# Altium PCB PCB1.PcbDoc
Units mm, origin at the board's own origin, x right, y up, seen from the top; angles counter-clockwise.
Board outline 40 x 100 mm, 2 copper layers (Top Layer, Bottom Layer); 27 components, 20 nets, 111 pads, 14 vias.
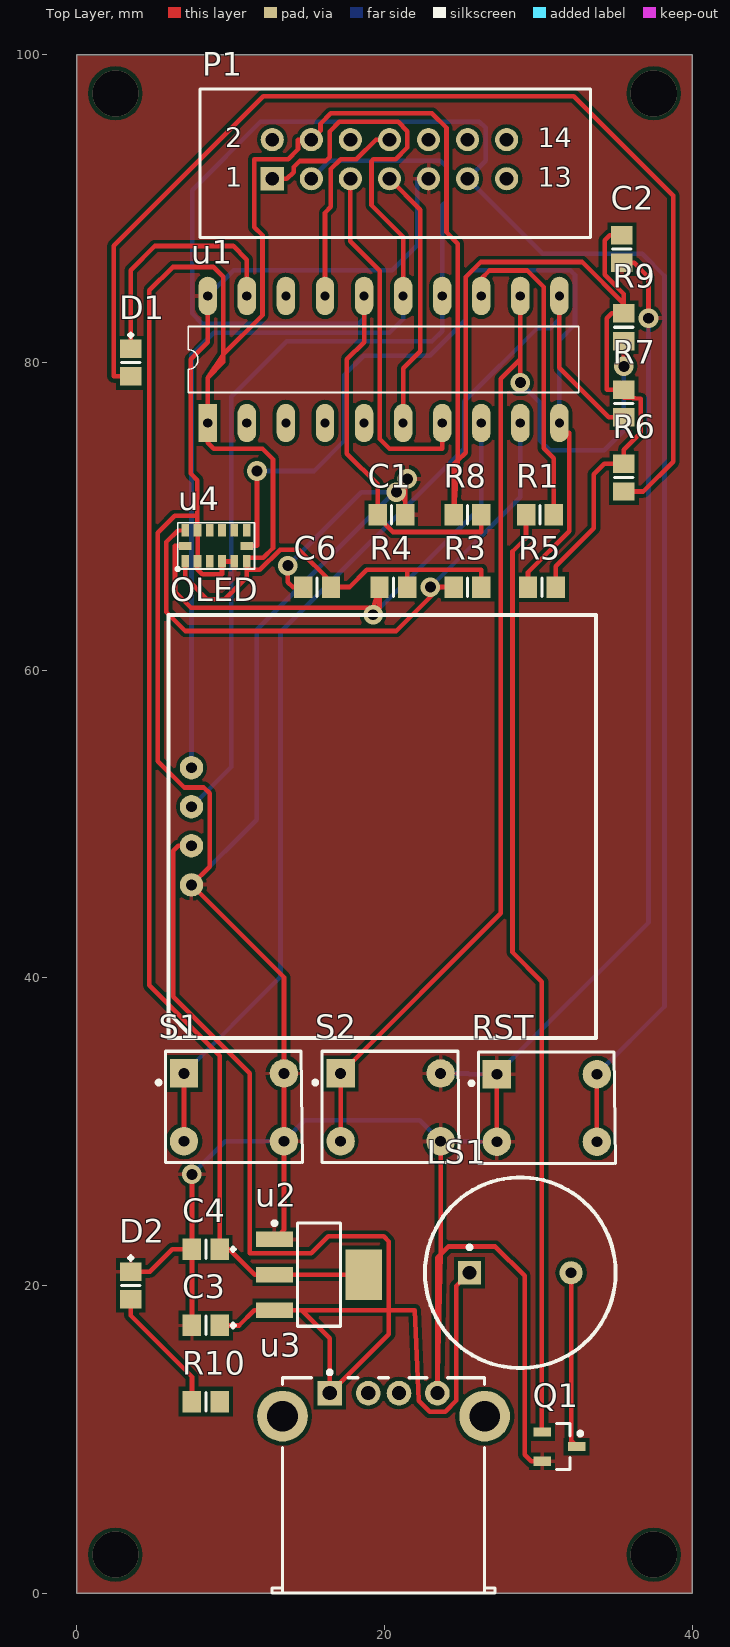
[diagram p0: Top Layer view]
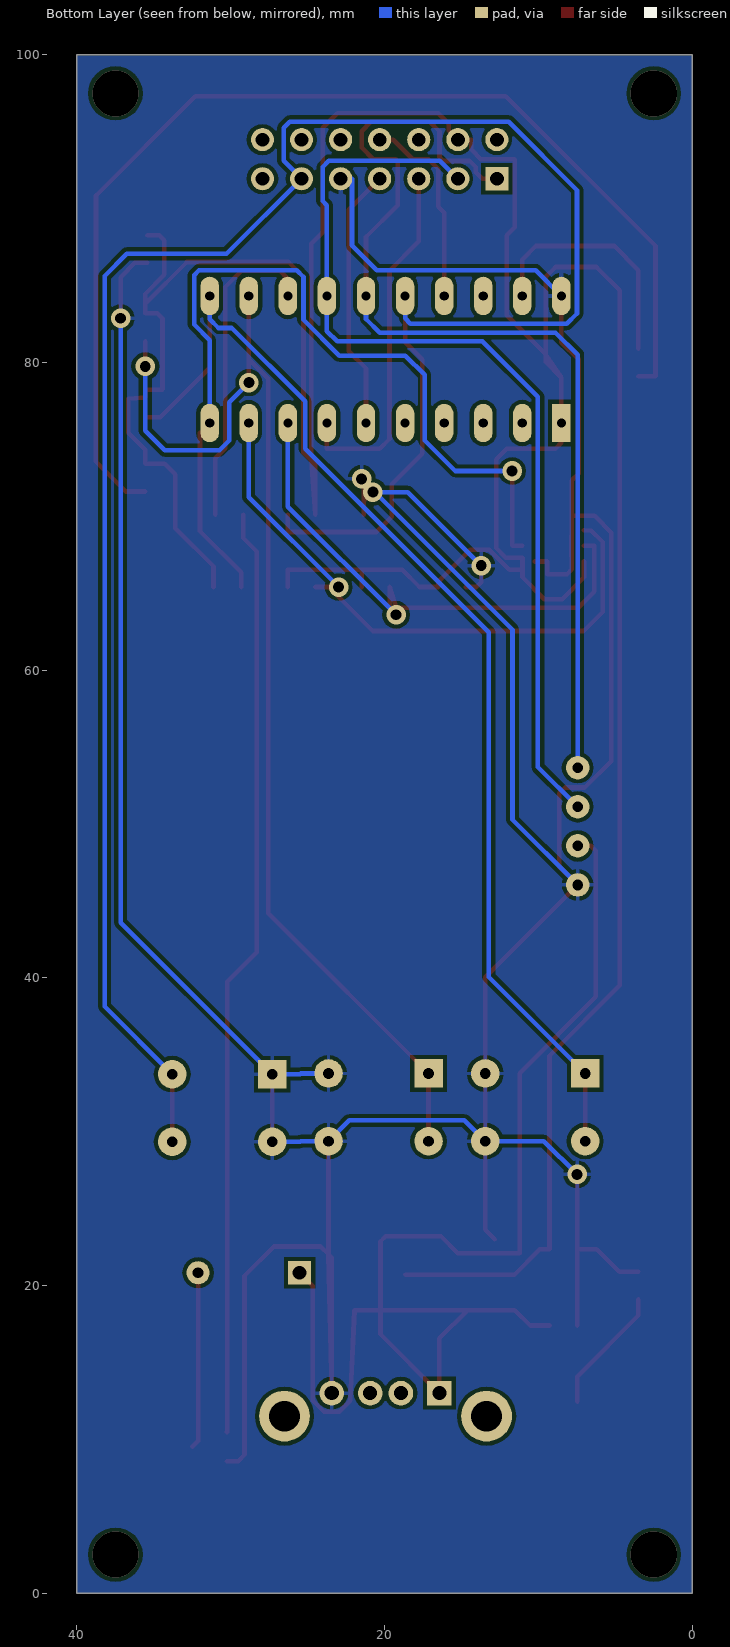
[diagram p1: Bottom Layer view, seen from below]

## Layer stack, top to bottom
Top Solder: solder mask 0.0102, Solder Resist, Dk 3.5
Top Layer: signal copper 0.0356
Dielectric 1: dielectric 0.32, FR-4, Dk 4.8
Bottom Layer: signal copper 0.0356
Bottom Solder: solder mask 0.0102, Solder Resist, Dk 3.5

## Board outline
0,0 0,100 40.005,100 40.005,0

## Design rules (kind name [scope] priority, off if disabled: settings)
Clearance [All] p1: gap=0.254 ignorepadtopadclearanceinfootprint=FALSE except(0: Arc-Hole Track-Hole SMDPad-Hole THPad-Hole Via-Hole Fill-Hole Poly-Hole Region-Hole Text-Hole)
PolygonConnect [All] p1: connectstyle=Relief reliefconductorwidth=0.254 reliefentries=4 polygonreliefangle="90 Angle" airgapwidth=0.254
RoutingVias [All] p1: holewidth=0.711 width=1.27 viastyle="Through Hole" minholewidth=0.711 minwidth=1.27 maxholewidth=0.711 maxwidth=1.27
SolderMaskExpansion [All] p1: expansion=0.102
Width Width_1 [All] p1: maxlimit=0.321 minlimit=0.28 preferedwidth=0.3
Width [All] p2: maxlimit=0.254 minlimit=0.254 preferedwidth=0.254
30 further rules are at their usual default settings.

## Classes and differential pairs
polygon class PolygonClass_1: NONET_L01_P010

## Components (designator, comment, footprint, x,y, rotation, side; value= is the part's Value field where it differs from the comment)
C1 "Cap" 6-0805_N 20.447,70.104 r180 top value=100pF
C2 "Cap" 6-0805_N 35.433,87.376 r90 top value=100pF
C3 "Cap Pol2" "6-0805_N - duplicate" 8.382,17.399 r0 top value=10uF
C4 "Cap Pol2" "6-0805_N - duplicate" 8.382,22.352 r0 top value=22uF
C6 "Cap" 6-0805_N 15.621,65.405 r0 top value=100pF
D1 "LED0" "6-0805_N - duplicate" 3.5,80 r90 top locked
D2 "LED0" "6-0805_N - duplicate" 3.5,20 r90 top locked
LS1 "Bell" bell 25.527,20.828 r0 top
OLED "+5" OLED 33.75,36.1 r90 top locked
P1 "JTAG" HDR2X7 12.7,91.948 r0 top
Q1 "NPN" SOT23_N 31.369,9.525 r0 top
R1 "Res2" 6-0805_N 30.099,70.104 r180 top value=1K
R3 "Res2" 6-0805_N 25.4,65.405 r0 top value=1K
R4 "Res2" 6-0805_N 20.574,65.405 r0 top value=1K
R5 "Res2" 6-0805_N 30.226,65.405 r0 top value=1K
R6 "Res2" 6-0805_N 35.56,72.517 r90 top value=1K
R7 "Res2" 6-0805_N 35.56,77.343 r90 top value=1K
R8 "Res2" 6-0805_N 25.4,70.104 r180 top value=1K
R9 "Res2" 6-0805_N 35.56,82.296 r90 top value=1K
R10 "Res2" 6-0805_N 8.382,12.446 r0 top value=1K
RST "SW-DPST" DPST-4 27.305,29.337 r0 top
S1 "SW-DPST" DPST-4 6.962,29.382 r0 top
S2 "SW-DPST" DPST-4 17.145,29.382 r0 top
u1 "msp430g2553_PDIP20" DIP20 8.509,76.068 r90 top
u2 "AMS1117-3.3V" SOT223_N 15.748,20.701 r0 top
u3 "USB" USB2.5-2H4 19.939,0 r270 top
u4 "ADXL345" ADXL345 6.546,66.578 r90 top

## Footprints (in the part's own frame and the unit in brackets; to place one, negate y for a bottom-side part, rotate by r counter-clockwise, add the part's x,y. Pads: shape width x height; smd on the part's side, far side on the other; paste and mask are expansions set on the pad)
6-0805_N [mm] "Chip Resistor, Body 2.0x1.2mm, IPC Medium Density"
  rect 1.2x1.4 smd: 1(-0.9,0) 2(0.9,0)
  silkscreen extent 0,-0.6 0,0.6, body extent -1.07,-0.7 1.07,0.7, height 0.7
"6-0805_N - duplicate" [mm] "Chip Resistor, Body 2.0x1.2mm, IPC Medium Density"
  rect 1.2x1.4 smd: 1(-0.9,0) 2(0.9,0)
  silkscreen extent 0,-0.6 1.91,0.6, body extent -1.07,-0.7 1.07,0.7, height 0.7
ADXL345 [mm]
  rect 0.813x0.5 smd: 1(0.49,-0.49) 2(0.49,-1.29) 3(0.49,-2.09) 4(0.49,-2.89) 5(0.49,-3.69) 6(0.49,-4.49) 8(2.51,-4.49) 9(2.51,-3.69) 10(2.51,-2.89) 11(2.51,-2.09) 12(2.51,-1.29) 13(2.51,-0.49)
  rect 0.5x0.813 smd: 7(1.5,-4.51) 14(1.5,-0.49)
  silkscreen extent -0.13,-5 3,0.13
bell [mm] "Photosensitive Diode; 2 Leads"
  rect 1.5x1.5 hole 0.9: 1(0,0)
  round 1.5 hole 0.7: 2(6.6,0)
  silkscreen extent -2.9,-6.2 9.5,6.2
DIP20 [mm]
  rect 2.5x1.2 hole 0.6: 1(0,0)
  oval 2.5x1.2 hole 0.6: 2(0,-2.54) 3(0,-5.08) 4(0,-7.62) 5(0,-10.16) 6(0,-12.7) 7(0,-15.24) 8(0,-17.78) 9(0,-20.32) 10(0,-22.86) 11(8.26,-22.86) 12(8.26,-20.32) 13(8.26,-17.78) 14(8.26,-15.24) 15(8.26,-12.7) 16(8.26,-10.16) 17(8.26,-7.62) 18(8.26,-5.08) 19(8.26,-2.54) 20(8.26,0)
  silkscreen extent 1.99,-24.13 6.28,1.27
DPST-4 [mm] "Switch; 4 Leads"
  rect 1.85x1.85 hole 0.7: 1(0,4.4)
  round 1.85 hole 0.7: 2(0,0) 3(6.5,4.4) 4(6.5,0)
  silkscreen extent -1.78,-1.4 7.7,5.84
HDR2X7 [mm] "Connector; Header; 7x2 Position"
  rect 1.5x1.5 hole 0.9: 1(0,0)
  round 1.5 hole 0.9: 2(0,2.54) 3(2.54,0) 4(2.54,2.54) 5(5.08,0) 6(5.08,2.54) 7(7.62,0) 8(7.62,2.54) 9(10.16,0) 10(10.16,2.54) 11(12.7,0) 12(12.7,2.54) 13(15.24,0) 14(15.24,2.54)
  silkscreen extent -4.7,-3.81 20.7,5.84
OLED [mm]
  round 1.524 hole 0.7: 1(12.48,26.3) 2(9.94,26.3) 3(15.02,26.3) 4(17.56,26.3)
  silkscreen extent 0,0 27.5,27.81
SOT23_N [mm] "SOT23, 3-Leads, Body 2.9x1.3mm, Pitch 0.95mm, Lead Span 2.3mm - Reverse Pinning, IPC Medium Density"
  rect 1.15x0.6 smd: 1(1.125,0) 2(-1.125,0.95) 3(-1.125,-0.95)
  silkscreen extent -0.2,-1.5 1.48,1.5, body extent -0.7,-1.5 0.7,1.5, height 1.1
SOT223_N [mm] "SOT223, 4-Leads, Body 6.5x3.5mm, Pitch 2.3mm, Lead Span 7mm, IPC Medium Density"
  rect 2.4x1 smd: 1(-2.9,2.3) 2(-2.9,0) 3(-2.9,-2.3)
  rect 2.4x3.3 smd: 4(2.9,0)
  silkscreen extent -3.02,-3.35 1.4,3.47, body extent -1.85,-3.35 1.85,3.35, height 1.7
USB2.5-2H4 [mm] "Connector; USB1.1, Series A, Reverse Type, Thru-Hole; 4 Position; Right Angle"
  rect 1.6x1.6 hole 0.92: 1(-13,-3.5)
  round 1.6 hole 0.92: 2(-13,-1) 3(-13,1) 4(-13,3.5)
  round 3.3 hole 2: 5(-11.5,6.57) 6(-11.5,-6.57)
  silkscreen extent -14.47,-7.25 0,7.25, body extent -14,-7.25 0,7.25, height 6.5

## Part data
C1 C2 C6: "Capacitor", LatestRevisionDate=17-Jul-2002, LatestRevisionNote="Re-released for DXP Platform.", PackageDescription="Radial Cap, Thru-Hole; 2 Leads; 0.3 in Pin Spacing", PackageReference=RAD-0.3, Published=8-Jun-2000, Publisher="Altium Limited"
C3 C4: "Polarized Capacitor (Axial)", LatestRevisionDate=17-Jul-2002, LatestRevisionNote="Re-released for DXP Platform.", PackageDescription="Polarized Capacitor; 2 Leads", PackageReference=POLAR0.8, Published=8-Jun-2000, Publisher="Altium Limited"
D1 D2: "Typical INFRARED GaAs LED", LatestRevisionDate=08-Jul-2005, LatestRevisionNote="Mech Layer 1 removed.", PackageDescription="LED; 2 Leads", PackageReference=LED-0, Published=8-Jun-2000, Publisher="Altium Limited"
LS1: "Electrical Bell", LatestRevisionDate=17-Jul-2002, LatestRevisionNote="Re-released for DXP Platform.", PackageReference=PIN2, Published=24-Mar-1999, Publisher="Altium Limited"
OLED: library part OLED
P1: "Header, 7-Pin, Dual row", LatestRevisionDate=17-Jul-2002, LatestRevisionNote="Re-released for DXP Platform.", Publisher="Altium Limited"
Q1: "NPN Bipolar Transistor", Code_JEDEC=TO-226-AA, LatestRevisionDate=17-Jul-2002, LatestRevisionNote="Re-released for DXP Platform.", PackageDescription="TO, Flat Index; 3 In-Line, Axial Leads; Body Dia. 4.8mm; Leads 0.55 x 0.51 mm (max)", PackageReference=TO-226-AA, Published=8-Jun-2000, Publisher="Altium Limited"
R1 R3 R4 R5 R6 R7 R8 R9 R10: "Resistor", LatestRevisionDate=17-Jul-2002, LatestRevisionNote="Re-released for DXP Platform.", PackageDescription="Axial Device, Thru-Hole; 2 Leads; 0.4 in Pin Spacing", PackageReference=AXIAL-0.4, Published=8-Jun-2000, Publisher="Altium Limited"
RST S1 S2: "Double-Pole, Single-Throw Switch", LatestRevisionDate=17-Jul-2002, LatestRevisionNote="Re-released for DXP Platform.", PackageDescription="Switch; 4 Leads", PackageReference=DPST-4, Published=24-Mar-1999, Publisher="Altium Limited"

## Via types
v1: diameter 1.27, hole 0.711, Top Layer to Bottom Layer, 10 vias
v2: diameter 3, hole 3, Top Layer to Bottom Layer, 4 vias

## Nets (pads, with @x,y where several pads share a name; then routed paths per layer and width w, separated by ;. In a path a pad name is that pad's centre, name@x,y a point inside that pad or via, vN(x,y) a via of type N, cw(c..) or ccw(c..) an arc to the next point about the centre after c; other vN are vias at no path point)
+5V: C3.2 LS1.1 OLED.1 u2.3 u3.1 | length 87.5
  Top Layer w0.3: OLED.1 6.594,48.58 6.274,48.26 6.274,38.76 11.227,33.807 11.227,22.097 15.239,22.097 16.332,23.19 19.939,23.19 20.269,22.86 20.269,18.401 ; C3.2 10.541,17.399 11.543,18.401 u2.3 14.605,18.401 ; LS1.1 24.663,19.964 24.663,12.522 23.938,11.796 22.94,11.796 22.225,12.511 21.96,18.401 20.269,18.401 ; 14.605,18.401 20.269,18.401 ; 14.605,18.401 16.439,16.567 u3.1 20.269,16.83 20.269,18.401
BEEP: R1.1 u1.13 | length 20.9
  Top Layer w0.3: u1.13 26.289,85.446 26.825,85.982 29.283,85.982 30.353,84.912 30.353,74.422 30.999,73.776 R1.1
CS: R5.1 u1.10 u4.7 | length 58.3
  Top Layer w0.3: u4.7 11.709,68.078 v1(11.709,72.949) ; R5.1 29.326,66.358 32.004,69.035 32.004,75.438 31.369,75.438 u1.10
  Bottom Layer w0.3: v1(11.709,72.949) 15.418,72.949 17.399,74.93 17.399,79.197 18.652,80.45 22.944,80.45 25.273,82.779 25.273,85.56 25.717,86.004 32.067,86.004 32.385,85.687 32.385,82.474 31.369,81.458 u1.10
GND: C1.1 C2.1 C3.1 C4.1 C6.1 D2.2 OLED.2 P1.9 Q1.3 RST.1 RST.2 S1.3 S1.4 S2.3 S2.4 u1.20 u2.1 u3.4 u4.2 u4.4 u4.5 u4.12 | length 290.1
  Top Layer w0.3: D2.2 4.75,20.9 6.202,22.352 C4.1 ; C3.1 C4.1 ; v1(7.482,27.218) C4.1 ; u1.20 8.509,81.331 7.391,80.213 7.391,72.784 7.836,72.339 7.836,69.939 ; u4.5 u4.4 9.436,66.243 8.143,66.243 7.836,66.55 u4.2 7.836,67.412 7.849,67.424 7.849,68.732 7.836,68.732 u4.12 7.836,69.939 ; u2.1 13.462,23.615 S1.4 S1.3 13.462,40.028 OLED.2 8.636,47.226 8.636,51.994 8.255,52.375 6.985,52.375 5.267,54.092 5.267,68.945 6.35,70.028 7.747,70.028 7.836,69.939 ; v1(13.716,66.802) 13.716,65.722 14.034,65.405 C6.1 ; v1(20.766,71.577) 21.347,70.996 ; C1.1 21.347,70.996 ; v1(21.488,72.441) 21.347,72.299 21.347,70.996 ; S2.4 23.645,22.019 ; RST.2 RST.1 ; Q1.3 29.527,8.575 29.108,8.994 29.108,20.625 27.203,22.53 24.155,22.53 23.645,22.019 ; C2.1 36.231,86.476 37.16,85.546 v1(37.16,82.88) ; 23.645,22.019 23.439,21.813 u3.4 23.645,22.019
  Bottom Layer w0.3: OLED.2 11.684,50.274 11.684,62.636 v1@20.625,71.577 ; v1(7.482,27.218) 9.646,29.382 S1.4 14.814,30.734 22.293,30.734 S2.4 25.451,29.382 25.496,29.337 RST.2 ; u1.20 10.185,86.004 20.498,86.004 22.123,87.63 22.123,91.948 P1.9 ; v1(13.716,66.802) 18.491,71.577 v1@20.625,71.577 ; v1(20.766,71.577) v1@20.625,71.577 ; v1(21.488,72.441) v1@20.625,71.577 ; S2.3 25.451,33.782 25.496,33.737 RST.1 37.16,43.592 v1(37.16,82.88)
LED1: D1.2 u1.19 | length 16
  Top Layer w0.3: D1.2 3.5,85.999 5.08,87.579 10.16,87.579 11.049,86.69 u1.19
NetD1_1: D1.1 R6.1 | length 74
  Top Layer w0.3: D1.1 2.388,79.1 2.388,87.579 12.116,97.307 32.309,97.307 38.76,90.856 38.76,73.547 36.83,71.617 R6.1
NetD2_1: D2.1 R10.1 | length 8.3
  Top Layer w0.3: D2.1 3.5,18.048 7.482,14.066 R10.1
NetLS1_2: LS1.2 Q1.1 | length 11.5
  Top Layer w0.3: LS1.2 32.127,9.892 Q1.1
NetQ1_2: Q1.2 R1.2 | length 60.8
  Top Layer w0.3: R1.2 29.199,68.594 28.321,67.716 28.321,41.656 30.226,39.751 30.226,10.475 Q1.2
RST: C1.2 P1.11 R8.1 RST.3 RST.4 u1.16 | length 143.4
  Top Layer w0.3: u1.16 18.669,81.331 17.551,80.213 17.551,74.081 19.547,72.085 C1.2 19.547,69.963 20.523,68.986 26.3,68.986 R8.1 ; RST.4 RST.3
  Bottom Layer w0.3: u1.16 18.669,82.867 18.326,82.525 8.153,82.525 7.493,83.185 7.493,91.211 11.938,95.656 26.162,95.656 26.568,95.25 26.568,93.116 P1.11 30.277,87.071 36.754,87.071 38.202,85.623 38.202,38.134 RST.3
SCL: OLED.3 P1.3 u1.14 | length 63.4
  Bottom Layer w0.3: OLED.3 10.033,53.703 10.033,77.775 13.64,81.382 23.089,81.382 23.749,82.042 u1.14 23.749,90.221 24.028,90.5 24.028,92.71 23.622,93.116 16.408,93.116 P1.3
SCLK: R4.1 u1.8 u4.14 | length 35.7
  Top Layer w0.3: u4.14 6.375,68.078 6.375,65.1 7.417,64.059 19.253,64.059 R4.1 19.674,64.022 v1(19.253,63.602)
  Bottom Layer w0.3: v1(19.253,63.602) 26.289,70.637 u1.8
SDA: OLED.4 P1.1 u1.15 | length 68.2
  Top Layer w0.3: P1.1 13.652,91.948 14.086,92.381 14.086,92.71 14.478,93.102 16.191,93.102 16.434,93.345 16.434,95.021 17.054,95.642 20.893,95.642 21.488,95.047 21.488,93.98 20.726,93.218 19.279,93.218 19.152,93.091 19.152,90.221 21.209,88.163 u1.15
  Bottom Layer w0.3: OLED.4 7.45,80.5 8.89,81.94 20.32,81.94 21.209,82.829 u1.15
SDI: R3.1 u1.9 u4.13 | length 40.2
  Top Layer w0.3: u4.13 6.553,69.063 5.821,68.331 5.821,63.78 7.052,62.549 20.766,62.549 23.622,65.405 ; v1(22.987,65.405) 23.622,65.405 ; R3.1 23.622,65.405
  Bottom Layer w0.3: v1(22.987,65.405) 28.829,71.247 u1.9
SW1: R7.1 S1.1 S1.2 u1.11 | length 75.7
  Top Layer w0.3: S1.2 S1.1 ; u1.11 31.369,79.654 34.58,76.443 R7.1
  Bottom Layer w0.3: S1.1 13.233,40.053 13.233,62.459 25.171,74.397 25.171,77.47 29.947,82.245 30.797,82.245 31.369,82.817 u1.11
SW2: R9.1 S2.1 S2.2 u1.12 | length 77.7
  Top Layer w0.3: S2.2 S2.1 27.559,44.196 27.559,78.943 28.829,80.213 ; v1(28.829,78.689) 28.829,80.213 ; u1.12 28.829,80.213 ; v1(35.56,79.756) R9.1
  Bottom Layer w0.3: v1(28.829,78.689) 30.099,77.419 30.099,74.93 30.734,74.295 34.29,74.295 35.56,75.565 v1(35.56,79.756)
TCK: P1.7 u1.6 | length 17.2
  Top Layer w0.3: P1.7 22.327,89.941 22.327,80.747 21.209,79.629 u1.6
TEST: P1.8 u1.17 | length 13
  Top Layer w0.3: u1.17 16.129,89.738 16.51,90.119 16.51,92.583 17.145,93.218 18.174,93.218 19.444,94.488 P1.8
TMS: P1.5 u1.7 | length 23.7
  Top Layer w0.3: P1.5 17.78,87.884 19.685,85.979 19.685,75.032 20.32,74.397 23.749,74.397 u1.7
VDD3V3: C2.2 C4.2 C6.2 P1.4 R3.2 R4.2 R5.2 R6.2 R7.2 R8.2 R9.2 u1.1 u2.2 u2.4 u4.1 u4.6 | length 244.8
  Top Layer w0.3: u4.1 7.036,66.04 8.458,64.618 9.614,64.618 11.036,66.04 11.036,66.523 ; u2.4 u2.2 11.556,20.701 9.905,22.352 C4.2 9.282,34.939 4.713,39.508 4.713,84.698 6.223,86.208 8.89,86.208 9.525,85.573 9.525,80.543 ; R4.2 21.474,66.523 ; R3.2 26.3,66.523 21.474,66.523 ; R5.2 31.126,66.751 33.604,69.229 33.604,72.731 34.29,73.417 R6.2 35.56,74.334 36.664,75.438 36.664,77.636 35.56,77.724 R7.2 34.46,78.243 34.442,78.261 34.442,82.867 34.771,83.196 R9.2 35.56,83.82 ; C2.2 34.644,88.276 34.315,87.947 34.315,85.7 35.56,84.455 35.56,83.82 ; 8.509,79.019 9.525,80.543 ; 8.509,79.019 u1.1 8.509,74.778 8.89,74.397 12.065,74.397 12.751,73.711 12.751,67.945 12.116,67.31 11.036,67.31 u4.6 11.036,66.523 ; 8.509,79.019 9.525,80.035 9.525,80.543 ; 9.525,80.543 12.065,83.083 12.065,88.265 11.532,88.798 11.532,93.218 13.741,93.218 14.376,93.853 14.376,94.488 P1.4 15.839,95.087 15.839,95.525 16.51,96.196 23.082,96.196 24.028,95.25 24.028,88.468 24.765,87.732 24.765,73.646 ; 11.036,66.523 11.889,66.523 13.208,67.841 14.43,67.841 16.521,65.75 C6.2 17.729,65.405 18.847,66.523 21.474,66.523 ; 24.765,73.646 25.273,74.143 25.273,85.56 26.249,86.536 32.844,86.536 35.56,83.82 ; 24.765,73.646 R8.2 24.5,73.381 24.765,73.646
pads on no net: P1.2 P1.6 P1.10 P1.12 P1.13 P1.14 R10.2 u1.2 u1.3 u1.4 u1.5 u1.18 u3.2 u3.3 u3.5 u3.6 u4.3 u4.8 u4.9 u4.10 u4.11
copper on no net:
  other v2: 2.5,2.5 37.5,2.5 2.5,97.5 37.5,97.5

## Polygon pours and split planes (outlines as drawn)
GND on Bottom Layer "GND_L02_P024" (solid, pour order 24): 40.005,99.949 0,99.949 0,0 40.005,0
no net on Bottom Layer (solid, pour order 22): 0,99.949
GND on Bottom Layer "Bottom Layer-No Net 1" (solid, pour order 10): 0,101.473
GND on Top Layer "GND_L01_P026" (solid, pour order 26): 0,99.949 40.005,99.949 40.005,0 0,0
GND on Top Layer "Bottom Layer-No Net 2" (solid, remove dead copper, pour order 8): 0,101.473

## Silkscreen, mask and mechanical layers (free items; w line width, h text height)
Mechanical 1:
  the board outline again, w0.254

## Text inside footprints (layer, text, board x,y; h text height)
P1: Top Overlay "2" at 9.652,93.98 h1.27; Top Overlay "1" at 9.652,91.44 h1.27; Top Overlay "14" at 29.972,93.98 h1.27; Top Overlay "13" at 29.972,91.44 h1.27
u3: Mechanical 1 "PCB Edge" at 13.636,0.336 h0.25